# Altium PCB Buck_Converter_10A.PcbDoc
Units mm, origin at the board's own origin, x right, y up, seen from the top; angles counter-clockwise.
Board outline 70.1 x 70.36 mm, 4 copper layers (Top Layer, Layer 1, Layer 2, Bottom Layer), stack 0.603 mm thick; 27 components, 19 nets, 87 pads, 54 vias.
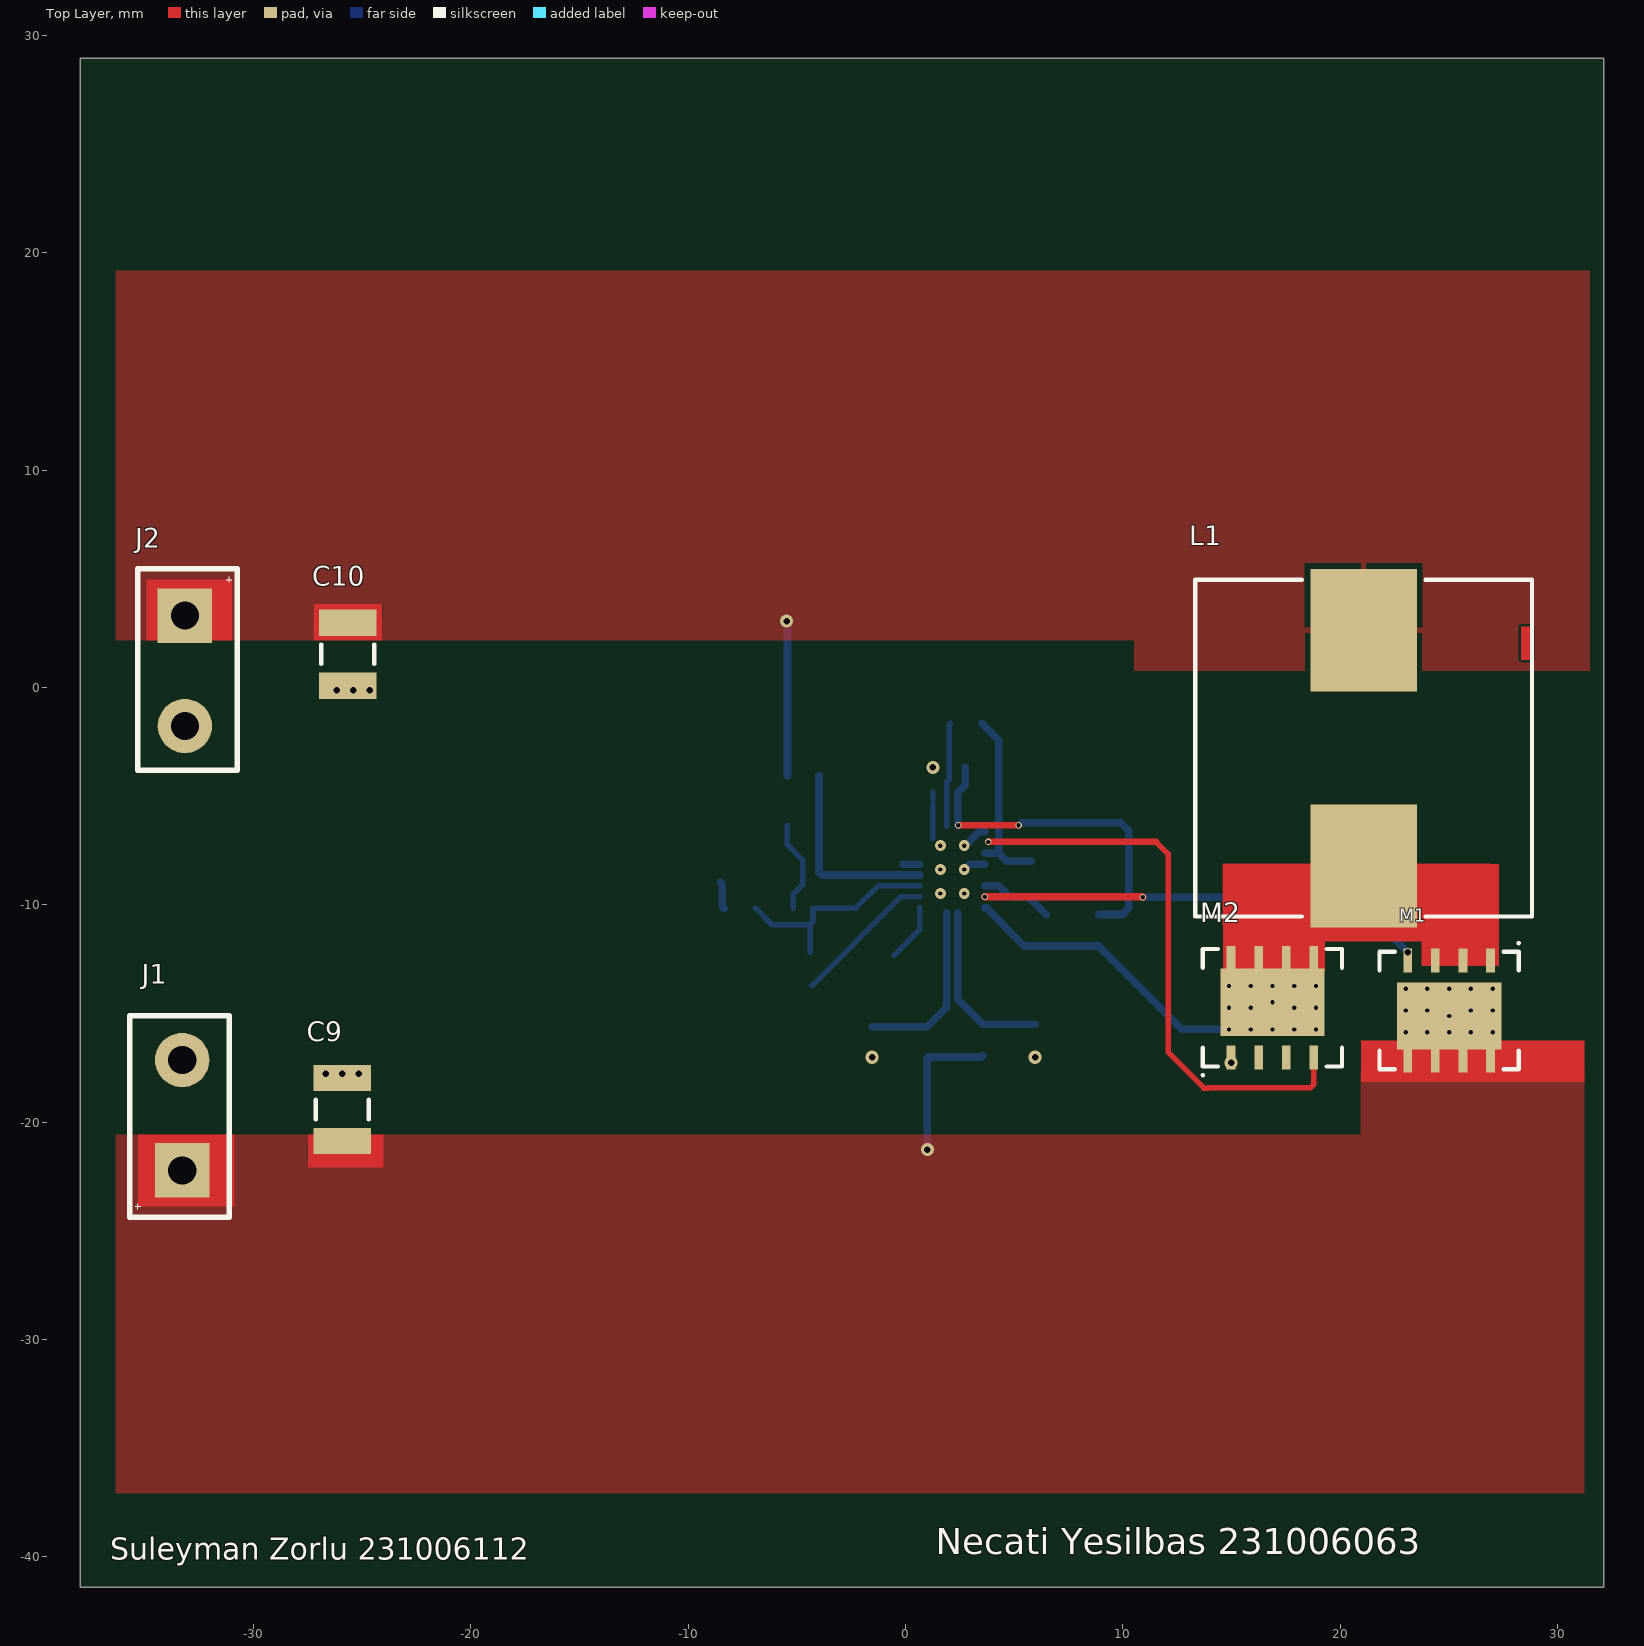
[diagram p0: Top Layer view]
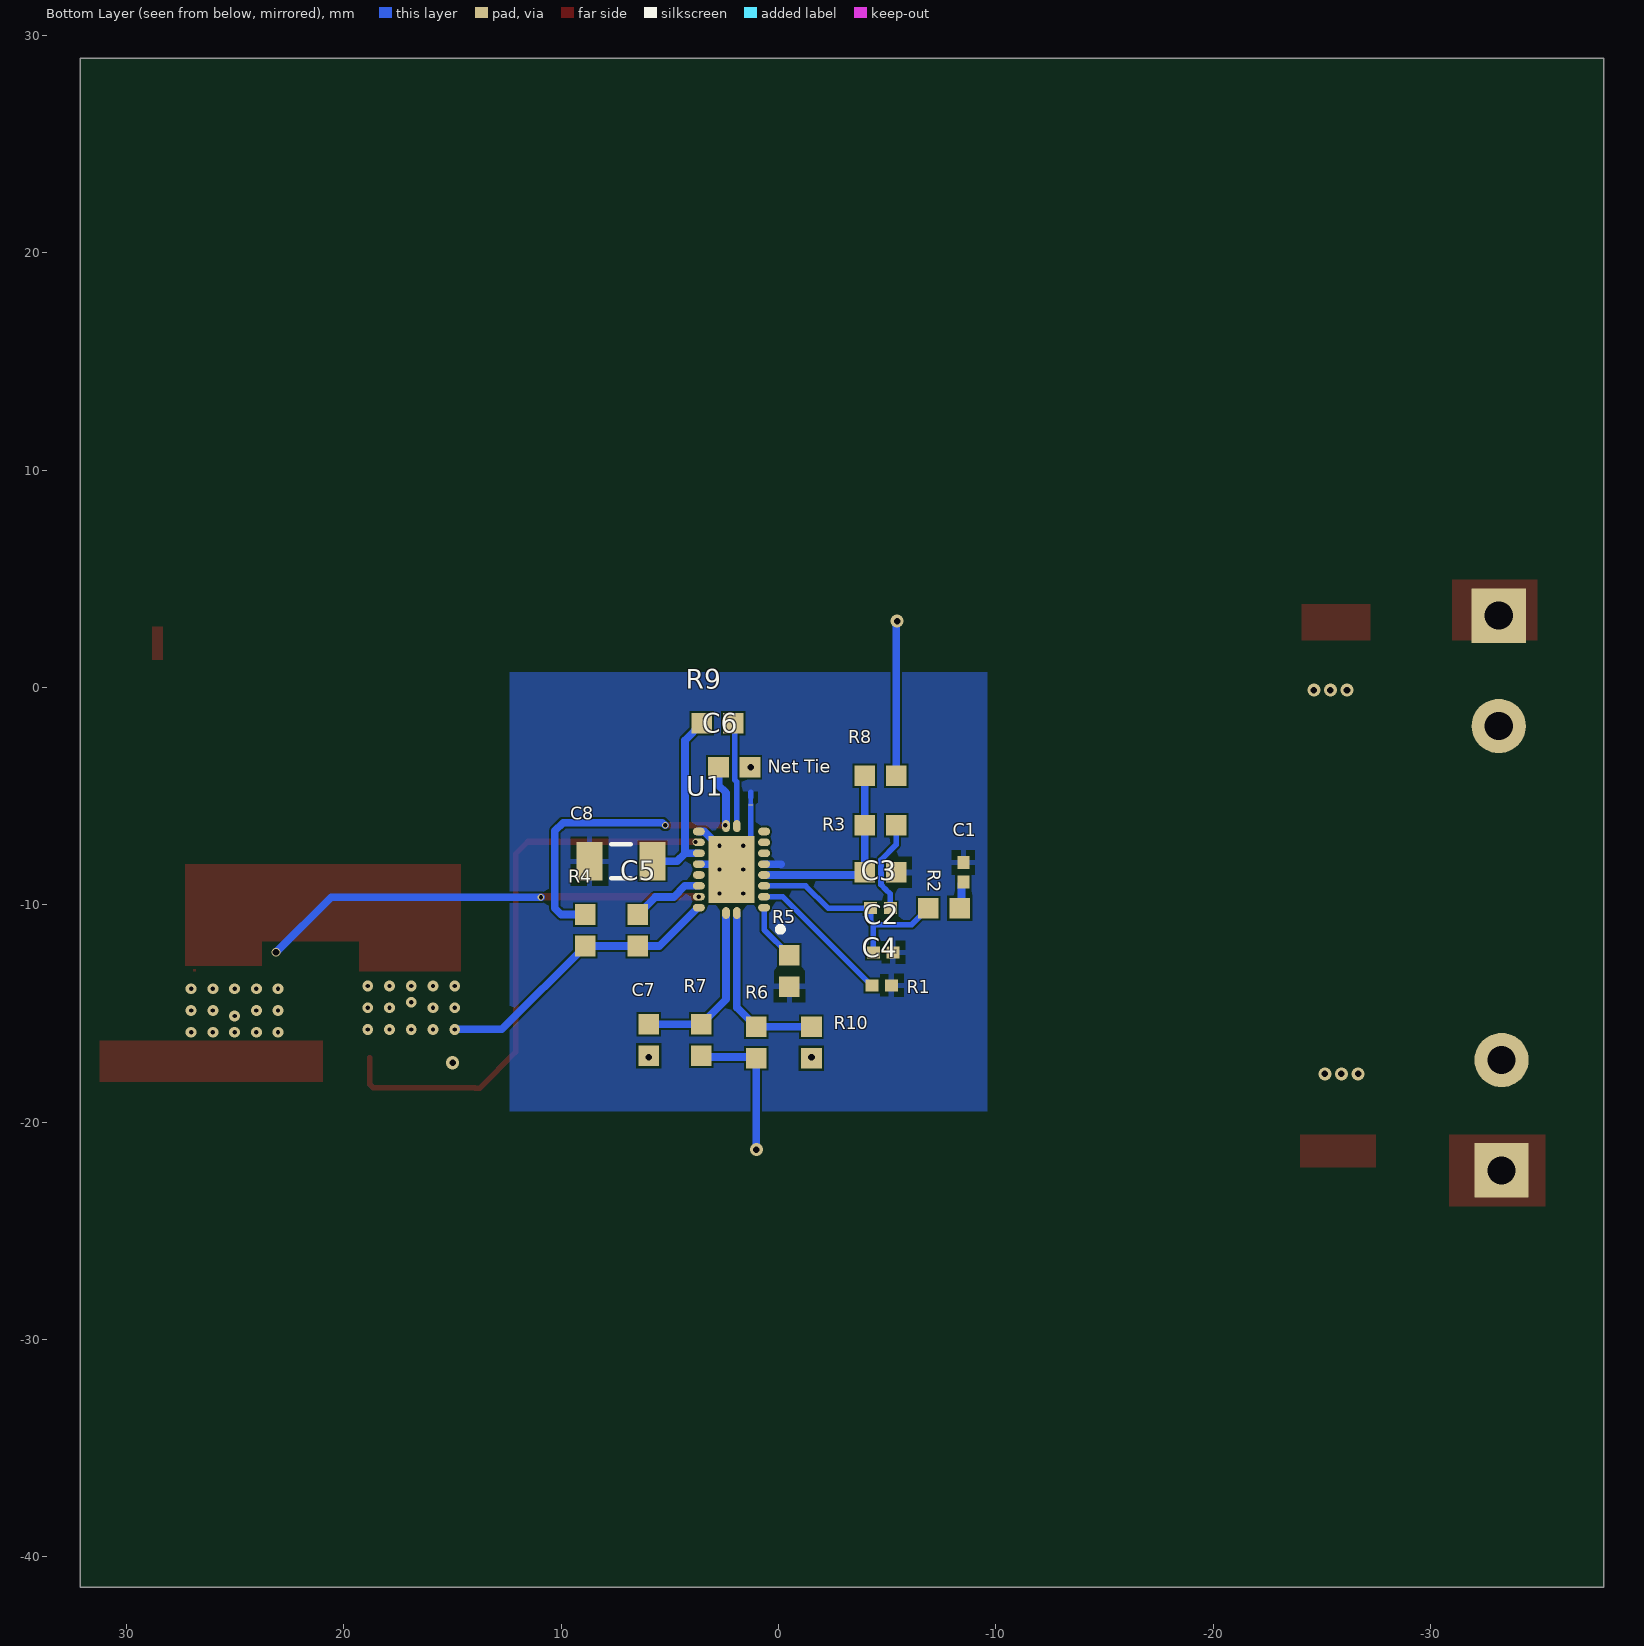
[diagram p1: Bottom Layer view, seen from below]
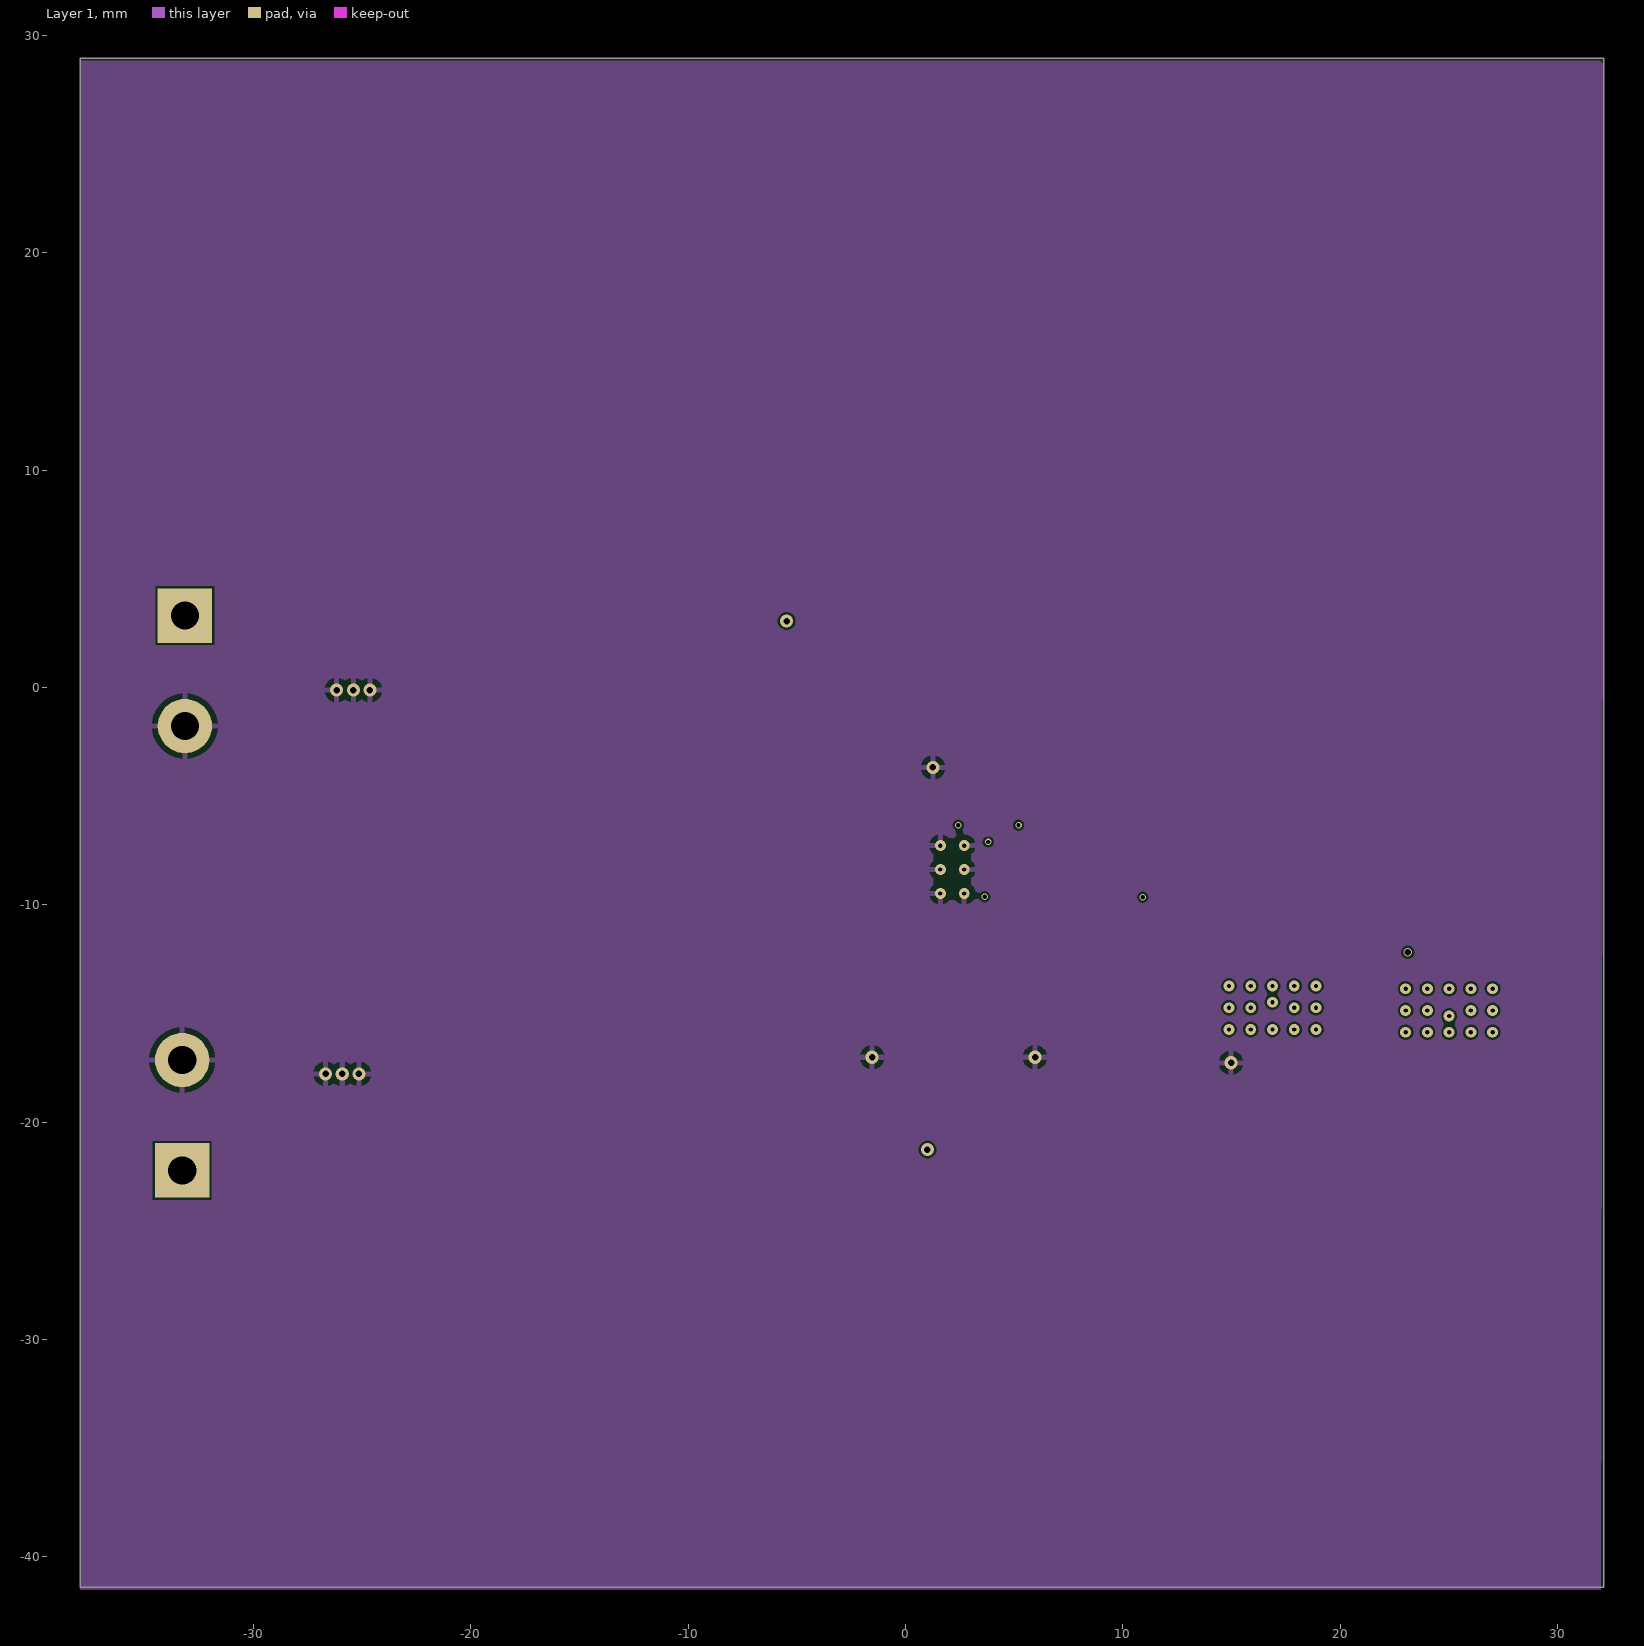
[diagram p2: Layer 1]

## Layer stack, top to bottom
Top Solder: solder mask 0.0102, Solder Resist, Dk 3.5
Top Layer: signal copper 0.0356
Dielectric 2: prepreg 0.0711, PP-006, Dk 4.1
Layer 1: signal copper 0.035
Dielectric 1: dielectric 0.32, FR-4, Dk 4.8
Layer 2: signal copper 0.035
Dielectric 3: prepreg 0.0711, PP-006, Dk 4.1
Bottom Layer: signal copper 0.0356
Bottom Solder: solder mask 0.0102, Solder Resist, Dk 3.5

## Board outline
-37.973,-41.402 32.131,-41.402 32.131,28.956 -37.973,28.956

## Design rules (kind name [scope] priority, off if disabled: settings)
Clearance [All] p1: gap=0.1 ignorepadtopadclearanceinfootprint=FALSE
MinimumSolderMaskSliver [All] p1 off: minsoldermaskwidth=0.254
NetAntennae [All] p1 off: netantennaetolerance=0
PolygonConnect [All] p1: connectstyle=Relief reliefconductorwidth=0.254 reliefentries=4 polygonreliefangle="90 Angle" airgapwidth=0.254
RoutingVias [All] p1: holewidth=0.711 width=1.27 viastyle="Through Hole" minholewidth=0.711 minwidth=1.27 maxholewidth=0.711 maxwidth=1.27
SilkToSilkClearance [All] p1 off: silktosilkclearance=0.254
SilkToSolderMaskClearance [IsPad] p1 off: minsilkscreentomaskgap=0.254 clearancetoexposedcopper=TRUE
SolderMaskExpansion [All] p1: expansion=0 istentingtop=FALSE
SupplyNets "Schematic Supply Nets_2" [InNet('AGND')] p1: voltage=0.000
SupplyNets "Schematic Supply Nets_1" [InNet('PGND')] p2: voltage=0.000
Width [All] p1 off: maxlimit=50 minlimit=0.254 preferedwidth=1 minimp=50.000000 maximp=50.000000 favimp=50.000000
26 further rules are at their usual default settings.

## Components (designator, comment, footprint, x,y, rotation, side; value= is the part's Value field where it differs from the comment)
C1 "0402 CAP 10 nF" RESC1005X06N -8.509,-8.509 r90 bottom
C2 "0402 1.2 nF" RESC1005X06N -4.826,-12.192 r180 bottom
C3 "0402 CAP 470 pF" RESC1005X06N -4.699,-10.16 r0 bottom
C4 "0402 CAP 56 nF" RESC1005X06N -4.757,-13.716 r180 bottom
C5 "0603 CAP 100 nF" RESC1608X06N 6.477,-11.176 r270 bottom
C6 "0603 CAP 12 pF" RESC1608X06N 2.032,-3.683 r180 bottom
C7 "0603 CAP 100 nF" RESC1608X06N 5.969,-16.219 r90 bottom
C8 "1206 2.2 µF" "1206 (Orta Boy Seramik)" 7.239,-8.001 r0 bottom
C9 "1210 4.7 µF" "1210 (En Büyük Seramik)" -25.908,-19.431 r90 top
C10 "1210 22 µF" "1210 (En Büyük Seramik)" -25.654,1.524 r270 top
J1 "Klemens" Klemens -33.274,-22.225 r90 top
J2 "Klemens" Klemens -33.147,3.302 r270 top
L1 "bobin" INDM150150X100N 21.082,-2.794 r90 top
M1 "MOSFET (CSD19502Q5B)" MOSFET+ 25.019,-14.868 r270 top
M2 "MOSFET (CSD19502Q5B)" MOSFET+ 16.891,-14.741 r90 top
"Net Tie" "Net Tie 10x8mil" "New footprint 1" 1.27,-5.232 r90 bottom net-tie
R1 "0402 1.37 kΩ" RESC1608X06N -7.62,-10.16 r180 bottom
R2 "0402 110 Ω" RESC1608X06N -4.699,-6.35 r180 bottom
R3 "0402 3.4 kΩ" RESC1608X06N -4.699,-8.509 r0 bottom
R4 "0402 422 Ω" RESC1608X06N 8.89,-11.176 r270 bottom
R5 "0402 49.9 kΩ" RESC1608X06N -0.508,-13.044 r270 bottom
R6 "0402 60.4 kΩ" RESC1608X06N 1.016,-16.346 r270 bottom
R7 "0603 2.1 Ω" RESC1608X06N 3.556,-16.219 r270 bottom
R8 "0603 18 kΩ" RESC1608X06N -4.699,-4.064 r180 bottom
R9 "0603 20 kΩ" RESC1608X06N 2.794,-1.651 r0 bottom
R10 "0603 8.45 kΩ" RESC1608X06N -1.524,-16.346 r90 bottom
U1 "LM25145RGYR" PQFN50P350X450X100_HS-21N 2.159,-8.382 r0 bottom

## Footprints (in the part's own frame and the unit in brackets; to place one, negate y for a bottom-side part, rotate by r counter-clockwise, add the part's x,y. Pads: shape width x height; smd on the part's side, far side on the other; paste and mask are expansions set on the pad)
"1206 (Orta Boy Seramik)" [mm] "Chip Capacitor, 2-Leads, Body 3,20x1,60mm, IPC Medium Density"
  rect 1.2x1.75 smd: 1(-1.45,0) 2(1.45,0)
  silkscreen extent -0.45,-0.77 0.45,0.77, body extent -1.65,-0.85 1.65,0.85, height 1.6
"1210 (En Büyük Seramik)" [mm] "Chip Capacitor, 2-Leads, Body 3,20x2,50mm, IPC Medium Density"
  rect 1.2x2.65 smd: 1(-1.45,0) 2(1.45,0)
  silkscreen extent -0.45,-1.22 0.45,1.23, body extent -1.65,-1.3 1.65,1.3, height 2.8
INDM150150X100N [mm] "Molded Inductor, 2-Leads, Body 15,00x15,00mm, IPC Medium Density"
  rect 5.65x4.9 smd: 1(-5.425,0) 2(5.425,0)
  silkscreen extent -7.75,-7.75 7.75,7.75, body extent -7.75,-7.75 7.75,7.75, height 10
Klemens [mm]
  rect 2.5x2.5 hole 1.3: 1(0,0)
  round 2.5 hole 1.3: 2(5.08,0)
  silkscreen extent -2.16,-2.16 7.11,2.41
MOSFET+ [mm] "SON, 8-Leads, Body 6,00x5,00mm, Pitch 1,27mm, Thermal Pad 4,80x3,09mm, IPC Medium Density"
  rect 1.1x0.4 smd: 1(-2.295,1.905) 2(-2.295,0.635) 3(-2.295,-0.635) 4(-2.295,-1.905) 5(2.295,1.905) 5(2.295,-0.635) 5(2.295,0.635) 5(2.295,-1.905)
  rect 3.09x4.8 smd paste-1.545: 5(0.254,0)
  silkscreen extent -3.15,-3.2 2.7,3.25, body extent -2.55,-3.05 2.55,3.05, height 1.05
"New footprint 1" [mil]
  rect 1x8 smd: 1(-6.89,0) 2(6.89,0)
  Top Layer region: -6.89,4 6.89,4 6.89,-4 -6.89,-4
PQFN50P350X450X100_HS-21N [mm] "PQFN, 20-Leads, Body 3,50x4,50mm, Pitch 0,50mm, Thermal Pad 2,10x3,10mm, IPC Medium Density"
  oval 0.35x0.55 smd: 1(-0.25,2) 10(-0.25,-2) 11(0.25,-2) 20(0.25,2)
  oval 0.55x0.35 smd: 2(-1.5,1.75) 3(-1.5,1.25) 4(-1.5,0.75) 5(-1.5,0.25) 6(-1.5,-0.25) 7(-1.5,-0.75) 8(-1.5,-1.25) 9(-1.5,-1.75) 12(1.5,-1.75) 13(1.5,-1.25) 14(1.5,-0.75) 15(1.5,-0.25) 16(1.5,0.25) 17(1.5,0.75) 18(1.5,1.25) 19(1.5,1.75)
  rect 2.1x3.1 smd: 21(0,0)
  silkscreen extent -2.37,2.63 -2.12,2.87, body extent -1.8,-2.3 1.8,2.3, height 1
RESC1005X06N [mm] "Chip Resistor, 2-Leads, Body 1,00x0,50mm, IPC Medium Density"
  rect 0.6x0.55 smd: 1(-0.45,0) 2(0.45,0)
  body extent -0.55,-0.27 0.55,0.28, height 0.55
RESC1608X06N [mm] "Chip Resistor, 2-Leads, Body 1,60x0,85mm, IPC Medium Density"
  rect 0.95x0.95 smd: 1(-0.725,0) 2(0.725,0)
  body extent -0.85,-0.48 0.85,0.48, height 0.6

## Part data
C1 C2 C3 C4: library part "0402 CAP"
C5 C6 C7: library part "0603 CAP"
C8: library part "1206 orta boy kondansatör"
C9 C10: library part "1210 kondansatör"
"Net Tie": library part CMP-009-00116-2, Max Operating Temperature=155°C, Min Operating Temperature=-55°C, Pins=2
R1 R2 R3 R4 R5 R6: library part "direnç 0402"
R7 R8 R9 R10: library part direnç

## Via types
v1: diameter 0.5, hole 0.2, Top Layer to Bottom Layer, 36 vias
v2: diameter 0.6, hole 0.3, Top Layer to Bottom Layer, 12 vias
v3: diameter 0.3, hole 0.2, Top Layer to Bottom Layer, 5 vias
v4: diameter 0.4, hole 0.3, Top Layer to Bottom Layer, 1 vias

## Nets (pads, with @x,y where several pads share a name; then routed paths per layer and width w, separated by ;. In a path a pad name is that pad's centre, name@x,y a point inside that pad or via, vN(x,y) a via of type N, cw(c..) or ccw(c..) an arc to the next point about the centre after c; other vN are vias at no path point)
AGND: "Net Tie.2" C1.2 C2.2 C4.2 C8.2 R3.1 R5.2 U1.6 | length 1
  Bottom Layer w0.25: 1.27,-5.057 1.27,-4.826
  Bottom Layer w0.35: -0.123,-8.132 U1.6
GATE_M1: M1.4 U1.18 | length 20.5
  Top Layer w0.35: v3(3.659,-9.632) 10.902,-9.632 v3(10.922,-9.652)
  Bottom Layer w0.35: v3(10.922,-9.652) 20.574,-9.652 v4(23.114,-12.192)
GATE_M2: M2.4 U1.13 | length 26.3
  Top Layer w0.254: 11.535,-7.112 12.086,-7.663 12.086,-16.785 13.738,-18.437 13.948,-18.437 13.97,-18.415 18.647,-18.415 18.796,-18.266 M2.4
  Top Layer w0.3: v3(3.81,-7.112) 11.535,-7.112
NetC1_1: C1.1 R1.2 | length 1.3
  Bottom Layer w0.35: C1.1 -8.427,-9.041 -8.427,-10.078 R1.2
NetC2_1: C2.1 C3.2 R1.1 U1.4 | length 10.2
  Bottom Layer w0.254: R1.1 -6.133,-10.922 -4.398,-10.922 ; C2.1 -4.376,-10.944 -4.398,-10.922 ; U1.4 -1.257,-9.132 -2.285,-10.16 C3.2 -4.249,-10.773 -4.398,-10.922
NetC3_1: C3.1 R2.2 | length 4.3
  Bottom Layer w0.254: R2.2 -5.424,-7.238 -4.722,-7.94 -4.722,-9.078 -4.935,-9.291 ; C3.1 -5.149,-9.504 -4.936,-9.291
NetC4_1: C4.1 U1.3 | length 6.7
  Bottom Layer w0.254: C4.1 -4.282,-13.716 -0.198,-9.632 U1.3
NetC5_1: C5.1 U1.17 | length 3.4
  Bottom Layer w0.35: U1.17 4.306,-9.132 4.821,-9.647 5.673,-9.647 C5.1
NetC6_1: C6.1 R4.1 U1.11 | length 16
  Top Layer w0.3: v3(2.441,-6.35) v3(5.207,-6.35)
  Bottom Layer w0.35: v3(2.441,-6.35) U1.11 2.409,-4.858 2.757,-4.51 C6.1 ; v3(5.207,-6.35) 5.334,-6.223 9.906,-6.223 10.287,-6.604 10.287,-10.16 9.996,-10.451 R4.1
NetC7_2: C7.2 R7.1 U1.20 | length 8
  Bottom Layer w0.35: U1.20 2.409,-14.347 R7.1 C7.2
NetR2_1: R2.1 R3.2 R8.1 U1.5 | length 9.1
  Bottom Layer w0.35: R8.1 R2.1 R3.2 -3.851,-8.632 U1.5
NetR5_1: R5.1 U1.2 | length 2.7
  Bottom Layer w0.254: R5.1 0.659,-11.152 U1.2
NetR6_1: R6.1 R10.2 U1.1 | length 8.1
  Bottom Layer w0.35: R10.2 R6.1 1.909,-14.728 U1.1
NetR9_1: R9.1 U1.10 | length 4.8
  Bottom Layer w0.254: U1.10 1.909,-4.352 2.009,-4.252 2.009,-1.711 R9.1
PGND: "Net Tie.1" C6.2 C7.1 C9.2 C10.2 J1.2 J2.2 M2.1 R10.1 U1.12 U1.15 U1.21 | length 3.8
  Bottom Layer w0.25: U1.21@1.27,-6.959 1.27,-5.407
  Bottom Layer w0.35: v1(2.709,-8.382) 2.959,-8.132 U1.15 ; v1(2.709,-7.282) 2.759,-7.282 3.409,-6.632 U1.12
  other v1: 1.609,-9.482 2.709,-9.482 1.609,-8.382 1.609,-7.282
  other v2: -26.67,-17.78 -25.908,-17.78 -25.146,-17.78 14.986,-17.272 -1.524,-17.018 5.969,-17.018 1.27,-3.683 -26.162,-0.127 -25.4,-0.127 -24.638,-0.127
SW: C5.2 L1.1 M1.1 M1.2 M1.3 M2.5 R4.2 U1.19 | length 13.6
  Bottom Layer w0.35: U1.19 3.759,-10.132 3.759,-10.183 5.477,-11.901 C5.2 R4.2 12.718,-15.729 14.879,-15.729 v1(14.891,-15.741)
  other v1: 15.891,-15.741 16.891,-15.741 17.891,-15.741 18.891,-15.741 14.891,-14.741 15.891,-14.741 17.891,-14.741 18.891,-14.741 16.891,-14.487 14.891,-13.741 15.891,-13.741 16.891,-13.741 17.891,-13.741 18.891,-13.741
VCC: C8.1 R9.2 U1.14 | length 8.6
  Bottom Layer w0.35: R9.2 4.295,-2.427 4.295,-7.632 ; U1.14 4.295,-7.632 ; C8.1 4.664,-8.001 4.295,-7.632
VIN: C9.1 J1.1 M1.5 R6.2 R7.2 | length 6.8
  Bottom Layer w0.35: v2(1.016,-21.268) R6.2 1.079,-17.007 3.492,-17.007 R7.2
  other v1: 23.019,-15.868 24.019,-15.868 25.019,-15.868 26.019,-15.868 27.019,-15.868 25.019,-15.122 23.019,-14.868 24.019,-14.868 26.019,-14.868 27.019,-14.868 23.019,-13.868 24.019,-13.868 25.019,-13.868 26.019,-13.868 27.019,-13.868
VOUT: C10.1 J2.1 L1.2 R8.2 | length 7.1
  Bottom Layer w0.35: R8.2 v2@-5.424,3.048
  other v2: -5.461,3.048
pads on no net: M2.2 M2.3 U1.7 U1.8 U1.9 U1.16

## Polygon pours and split planes (outlines as drawn)
VOUT on Top Layer "VOUT_L01_P015" (solid, pour order 15): 10.541,0.762 31.496,0.762 31.496,19.177 10.541,19.177
VIN on Top Layer "VIN_L01_P014" (solid, pour order 14): 31.242,-17.653 20.955,-17.653 20.955,-30.607 31.242,-30.607
SW on Top Layer "SW_L01_P009" (solid, pour order 9): 14.605,-10.922 26.924,-10.922 26.924,-8.128 14.605,-8.128
VIN on Top Layer "VIN_L01_P013" (solid, pour order 13): -36.322,-20.574 31.242,-20.574 31.242,-37.084 -36.322,-37.084
VOUT on Top Layer "VOUT_L01_P016" (solid, pour order 16): -36.322,19.177 12.065,19.177 12.065,2.159 -36.322,2.159
PGND on Layer 1 "PGND_L02_P000" (solid, pour order 0): -37.973,-41.529 32.004,-41.529 32.131,28.829 -37.973,28.829
AGND on Bottom Layer "AGND_L04_P017" (solid, pour order 17): 12.364,0.686 -9.607,0.686 -9.607,-19.507 12.364,-19.507

## Other copper
Top Layer:
  rectangle net VOUT: -34.925,2.159 -30.988,4.953
  rectangle net VOUT: -27.233,2.159 -24.075,3.828
  rectangle net VOUT: 28.321,1.27 28.829,2.794
  rectangle net SW: 14.605,-13.081 19.304,-11.176
  rectangle net SW: 26.797,-13.081 26.924,-12.954
  rectangle net SW: 14.605,-11.684 26.924,-8.128
  rectangle net SW: 23.749,-12.573 26.924,-11.557
  rectangle net SW: 23.749,-12.827 27.305,-8.128
  rectangle net VIN: -27.487,-22.098 -24.003,-20.574
  rectangle net VIN: -35.306,-23.876 -30.861,-20.574
  rectangle net VIN: 20.955,-18.161 31.242,-16.256

## Silkscreen, mask and mechanical layers (free items; w line width, h text height)
Top Overlay:
  text "Necati Yesilbas 231006063" at 1.397,-39.878 h1.2
  text "Suleyman Zorlu 231006112" at -36.576,-40.132 h1
Mechanical 1:
  the board outline again, w0.01